# EAGLE board V1.2_Placa de sensores smd (EAGLE 5.10)
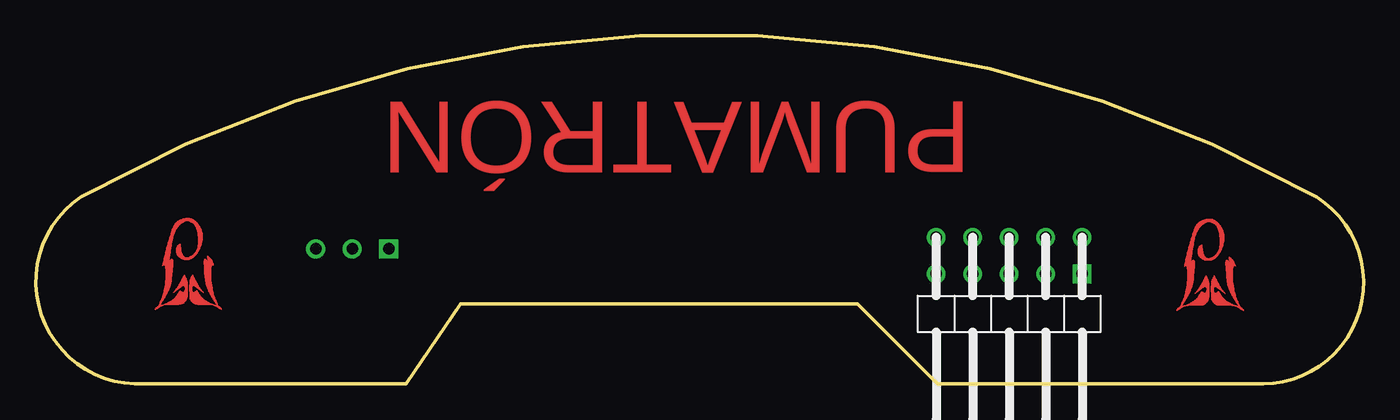
[diagram p0: board, top side]
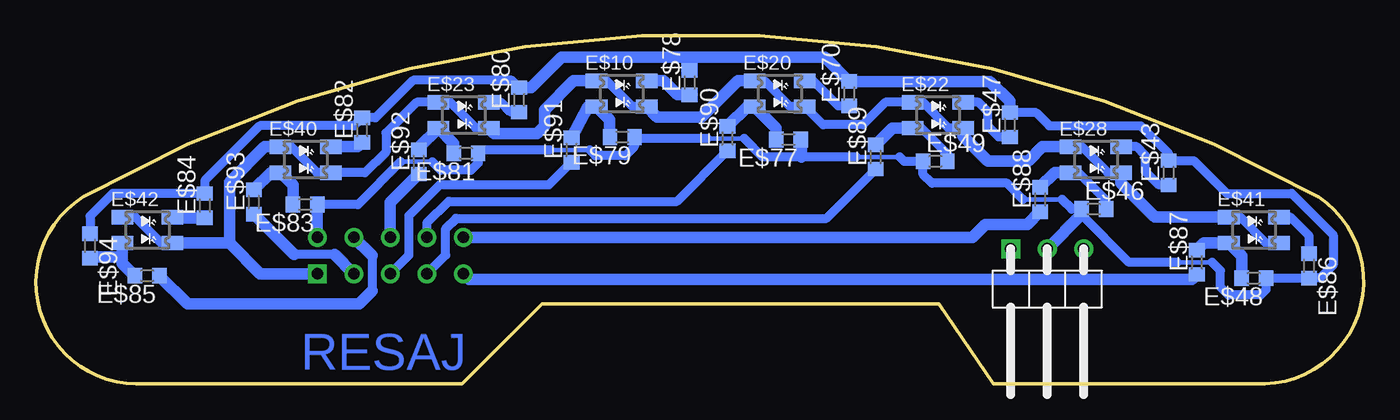
[diagram p1: board, bottom side, seen from below]

Size 92.39 x 24.25 mm. Coordinates in mm from the lower left corner, seen from the top.
Outline: 3.13,13.02 arc-59 89.13,13.02 arc-147 85.4,0 62.73,0 57.16,5.57 29.55,5.57 25.75,0.01 6.86,0.01 arc-144 3.13,13.02
Copper layers (1*16): Top 0.035mm / dielectric 1.5mm / Bottom 0.035mm
Design rules "default": minimum track width 10mil, minimum drill 24mil, track to track 8mil, track to pad 8mil, pad to pad 8mil, via to via 8mil, smd to smd 8mil, copper to edge 40mil, drill to drill 8mil, minimum pad ring 10mil, minimum via ring 8mil, stop-mask expansion 4mil, vias tented up to drill 0mil, thermal gap 10mil

## Footprints (pad centres in the part's own frame; a part is rotated, then mirrored left to right if it is on the bottom)
HSMFC655 = smd 1.5 x 1: A-GRN -1.75,0.9; A-RED -1.75,-0.9; K-GRN 1.75,0.9; K-RED 1.75,-0.9
R0603 = smd 1 x 1.1: 1 -0.85,0; 2 0.85,0
TIRADE3PINESTUMBADOS = drill 0.8 round: P$1 1.27,-1.524; P$2 3.81,-1.524 | drill 0.8 square: P$3 6.35,-1.524
CON_M_RT_ANG_2X5 = drill 0.8 round: P$1 -4.064,11.43; P$3 -1.524,8.89; P$4 -4.064,8.89; P$5 -4.064,6.35; P$6 -4.064,3.81; P$7 -4.064,1.27; P$8 -1.524,1.27; P$9 -1.524,3.81; P$10 -1.524,6.35 | drill 0.8 square: P$2 -1.524,11.43

## Placement (x,y rotation side)
E$1  [IMAGEN_MJ]  10.62,7.29 180 top
E$2  [IMAGEN_MJ]  81.72,7.23 180 top
E$10  [HSMFC655]  51.63,20.22 0 bottom
E$20  [HSMFC655]  40.63,20.22 0 bottom
E$22  [HSMFC655]  29.63,18.72 0 bottom
E$23  [HSMFC655]  62.63,18.72 0 bottom
E$28  [HSMFC655]  18.63,15.62 0 bottom
E$40  [HSMFC655]  73.63,15.62 0 bottom
E$41  [HSMFC655]  7.63,10.72 0 bottom
E$42  [HSMFC655]  84.63,10.72 0 bottom
E$43  [R0603]  13.57,14.71 90 bottom
E$44  [TIRADE3PINESTUMBADOS]  18.2,7.89 180 bottom
E$45  [CON_M_RT_ANG_2X5]  61.38,6.15 270 top
E$46  [R0603]  18.78,12.18 0 bottom
E$47  [R0603]  24.62,18.05 90 bottom
E$48  [R0603]  7.64,7.37 180 bottom
E$49  [R0603]  29.81,15.51 0 bottom
E$70  [R0603]  35.8,20.22 90 bottom
E$77  [R0603]  40.03,17.03 180 bottom
E$78  [R0603]  46.9,20.99 90 bottom
E$79  [R0603]  51.59,17.19 180 bottom
E$80  [R0603]  58.77,19.79 90 bottom
E$81  [R0603]  62.47,16.07 180 bottom
E$82  [R0603]  69.69,17.69 90 bottom
E$83  [R0603]  73.66,12.5 180 bottom
E$84  [R0603]  80.64,12.42 90 bottom
E$85  [R0603]  84.66,7.54 180 bottom
E$86  [R0603]  3.79,8.23 270 bottom
E$87  [R0603]  11.6,8.48 90 bottom
E$88  [R0603]  22.51,12.86 90 bottom
E$89  [R0603]  33.95,15.82 90 bottom
E$90  [R0603]  44.26,17.1 90 bottom
E$91  [R0603]  55.12,16.3 90 bottom
E$92  [R0603]  65.75,15.47 90 bottom
E$93  [R0603]  77.23,12.68 90 bottom
E$94  [R0603]  88.63,9.61 270 bottom

## Library data of the parts
E$1 E$2 E$44 E$45 = Robot
E$10 E$20 E$22 E$23 E$28 E$40-E$42 = opto-transmittter-hp
E$43 E$46-E$49 E$70 E$77-E$94 = smd-ipc

## Nets
S$3: E$23.A-RED E$81.2 E$92.2
S$5: E$42.A-RED E$85.2 E$94.2
S$6: E$40.A-RED E$83.2 E$93.2
S$7: E$45.P$5 E$92.1
S$8: E$10.A-RED E$79.2 E$91.2
S$9: E$20.A-RED E$77.2 E$90.2
S$10: E$22.A-RED E$49.2 E$89.2
S$11: E$28.A-RED E$46.2 E$88.2
S$14: E$41.A-RED E$48.2 E$87.2
S$66: E$41.K-GRN E$86.1
S$69: E$28.K-GRN E$43.1
S$70: E$22.K-GRN E$47.1
S$71: E$20.K-GRN E$70.1
S$72: E$10.K-GRN E$78.1
S$73: E$23.K-GRN E$80.1
S$74: E$40.K-GRN E$82.1
S$75: E$42.K-GRN E$84.1
S$76: E$45.P$4 E$85.1
S$77: E$45.P$3 E$93.1
S$78: E$10.A-GRN E$10.K-RED E$20.A-GRN E$20.K-RED E$22.A-GRN E$22.K-RED E$23.A-GRN E$23.K-RED E$28.A-GRN E$28.K-RED E$40.A-GRN E$40.K-RED E$41.A-GRN E$41.K-RED E$42.A-GRN E$42.K-RED E$45.P$2
S$79: E$45.P$10 E$91.1
S$80: E$45.P$6 E$90.1
S$81: E$45.P$9 E$89.1
S$82: E$45.P$7 E$88.1
S$83: E$45.P$8 E$87.1
S$85: E$43.2 E$44.P$2 E$45.P$1 E$46.1 E$47.2 E$48.1 E$49.1 E$70.2 E$77.1 E$78.2 E$79.1 E$80.2 E$81.1 E$82.2 E$83.1 E$84.2 E$86.2 E$94.1

## Tracks (layer width: path | path; a pad name or v marks a point on that pad's centre or on a via)
S$3
  Bottom 0.813: E$81.2 63.32,16.76 E$23.A-RED 65.75,16.45 E$92.2
S$5
  Bottom 0.813: 86.38,8.85 86.38,8.41 E$85.2 | 86.38,8.85 E$42.A-RED | E$94.2 88.54,8.85 86.38,8.85
S$6
  Bottom 0.813: E$93.2 76.04,14.72 E$40.A-RED 74.51,13.85 E$83.2
S$7
  Bottom 0.813: E$45.P$5 67.73,12.64 E$92.1
S$8
  Bottom 0.813: E$91.2 53.96,19.32 E$10.A-RED 52.49,18.43 E$79.2
S$9
  Bottom 0.813: E$90.2 42.89,19.32 E$20.A-RED 40.88,17.82 E$77.2
S$10
  Bottom 0.61: E$49.2 28.96,16.02 30.76,17.82 E$22.A-RED
  Bottom 0.813: E$89.2 32.8,17.82 E$22.A-RED
S$11
  Bottom 0.61: E$46.2 17.93,12.81 19.84,14.72 E$28.A-RED
  Bottom 0.813: E$88.2 21.5,14.72 E$28.A-RED
S$14
  Bottom 0.813: E$87.2 11.11,9.82 E$41.A-RED 8.49,8.93 E$48.2
S$66
  Bottom 0.61: E$86.1 3.79,10.3 5.11,11.62 E$41.K-GRN
S$69
  Bottom 0.61: E$43.1 14.24,13.86 15.19,14.81 15.19,15.92 15.79,16.52 E$28.K-GRN
S$70
  Bottom 0.61: E$47.1 25.39,17.2 26.15,17.96 26.15,18.97 26.8,19.62 E$22.K-GRN
S$71
  Bottom 0.61: E$70.1 36.56,19.37 38.31,21.12 E$20.K-GRN
S$72
  Bottom 0.813: E$78.1 47.73,20.14 48.71,21.12 E$10.K-GRN
S$73
  Bottom 0.61: E$80.1 59.35,18.94 60.03,19.62 E$23.K-GRN
S$74
  Bottom 0.813: E$40.K-GRN 70.01,16.52 E$82.1
S$75
  Bottom 0.813: E$84.1 82.83,11.57 E$42.K-GRN
S$76
  Bottom 0.61: 69.01,8.95 69.01,6.47
  Bottom 0.813: E$45.P$4 69.01,8.95 | 69.01,6.47 69.91,5.57 81.84,5.57 E$85.1
S$77
  Bottom 0.61: 71.62,9.02 74.42,9.02
  Bottom 0.813: E$45.P$3 71.62,9.02 | 74.42,9.02 E$93.1
S$78
  Bottom 0.61: E$40.A-GRN 74.63,16.52 72.83,14.72 E$40.K-RED 69.49,14.72 68.04,16.17 68.04,17.48 65.9,19.62 E$23.A-GRN 63.57,19.62 61.77,17.82 E$23.K-RED | E$42.A-GRN 85.47,11.62 83.67,9.82 E$42.K-RED | E$10.A-GRN 52.67,21.12 50.87,19.32 E$10.K-RED | E$20.A-GRN 41.71,21.12 39.91,19.32 E$20.K-RED 37.61,18.05 34.84,18.05 33.27,19.62 E$22.A-GRN 30.68,19.62 28.88,17.82 E$22.K-RED | E$41.K-RED 6.79,9.82 8.59,11.62 E$41.A-GRN | E$28.K-RED 17.81,14.72 19.61,16.52 E$28.A-GRN
  Bottom 0.813: E$40.A-GRN 76.47,16.52 78.92,14.07 78.92,9.82 | 78.92,9.82 E$42.K-RED | 78.92,9.82 76.77,7.67 E$45.P$2 | E$23.K-RED 60.51,17.45 57.53,17.45 57.01,17.97 57.01,19.08 54.97,21.12 E$10.A-GRN | E$10.K-RED 49.16,18.6 46.07,18.6 43.55,21.12 E$20.A-GRN | E$41.A-GRN 14.52,11.62 16.88,13.98 E$28.K-RED | E$22.K-RED 27.88,17.28 26.13,15.53 23.34,15.53 22.35,16.52 E$28.A-GRN
S$79
  Bottom 0.61: E$45.P$10 66.43,8.97 66.43,11.72 64.27,13.88 56.69,13.88 E$91.1
S$80
  Bottom 0.61: E$45.P$6 65.19,11.2 63.67,12.72 47.79,12.72 E$90.1
S$81
  Bottom 0.61: E$45.P$9 63.88,8.98 63.88,10.82 63.17,11.53 37.39,11.53 E$89.1
S$82
  Bottom 0.813: E$45.P$7 27.23,10.21 26.32,11.12 23.4,11.12 E$88.1
S$83
  Bottom 0.813: E$87.1 11.96,7.27 62.25,7.27 E$45.P$8
S$85
  Bottom 0.305: 64.81,15.48 67,15.48 | 53.84,16.3 56.64,16.3 | 43.1,17.1 45.68,17.1 | 32.28,15.82 35.31,15.82 | 20.99,12.86 23.7,12.86 | 10.53,8.48 12.97,8.48
  Bottom 0.61: E$94.1 88.63,11.69 87.05,13.27 E$84.2 80.64,14.17 76.82,17.99 70.24,17.99 E$82.2 68.76,18.54 66.14,21.16 59.29,21.16 E$80.2 | E$83.1 69.98,12.5 67,15.48 | 64.81,15.48 64.22,14.89 62.12,14.89 61.62,15.39 E$81.1 61.39,16.3 56.64,16.3 | 53.84,16.3 53.45,15.91 51.37,15.91 50.74,16.54 E$79.1 50.65,17.1 45.68,17.1 | 43.1,17.1 41.82,15.82 39.13,15.82 35.31,15.82 | 32.28,15.82 31.97,15.51 E$49.1 30.66,14.6 30.04,13.98 24.82,13.98 23.7,12.86 | 20.99,12.86 20.31,12.18 E$46.1 19.63,11.79 16.32,8.48 12.97,8.48 | 10.53,8.48 9.96,7.91 9.96,6.75 9.4,6.19 7.16,6.19 6.79,6.56 E$48.1 E$86.2 3.01,7.38 2.11,8.28 2.11,10.38 5,13.27 9.53,13.27 11.82,15.56 E$43.2 13.57,16.04 15.52,17.99 21.87,17.99 22.78,18.9 E$47.2
  Bottom 0.813: E$83.1 E$45.P$1 | E$77.1 39.13,16.98 39.13,15.82 | E$44.P$2 19.63,11.79 E$46.1 | E$80.2 57.92,20.64 55.81,22.75 46.9,22.75 | 46.9,22.75 E$78.2 | 46.9,22.75 37.48,22.75 E$70.2 26,21.07 24.62,19.69 E$47.2

## Text on the board
Top: PUMATRÓN
Bottom: RESAJ